# Altium PCB PCB1.PcbDoc
Units mil, origin at the board's own origin, x right, y up, seen from the top; angles counter-clockwise.
Board outline 1240 x 1035 mil, 2 copper layers (Top Layer, Bottom Layer), stack 42.17 mil thick; 34 components, 54 nets, 216 pads, 52 vias.
Unrouted connection lines stored in the file: 33.
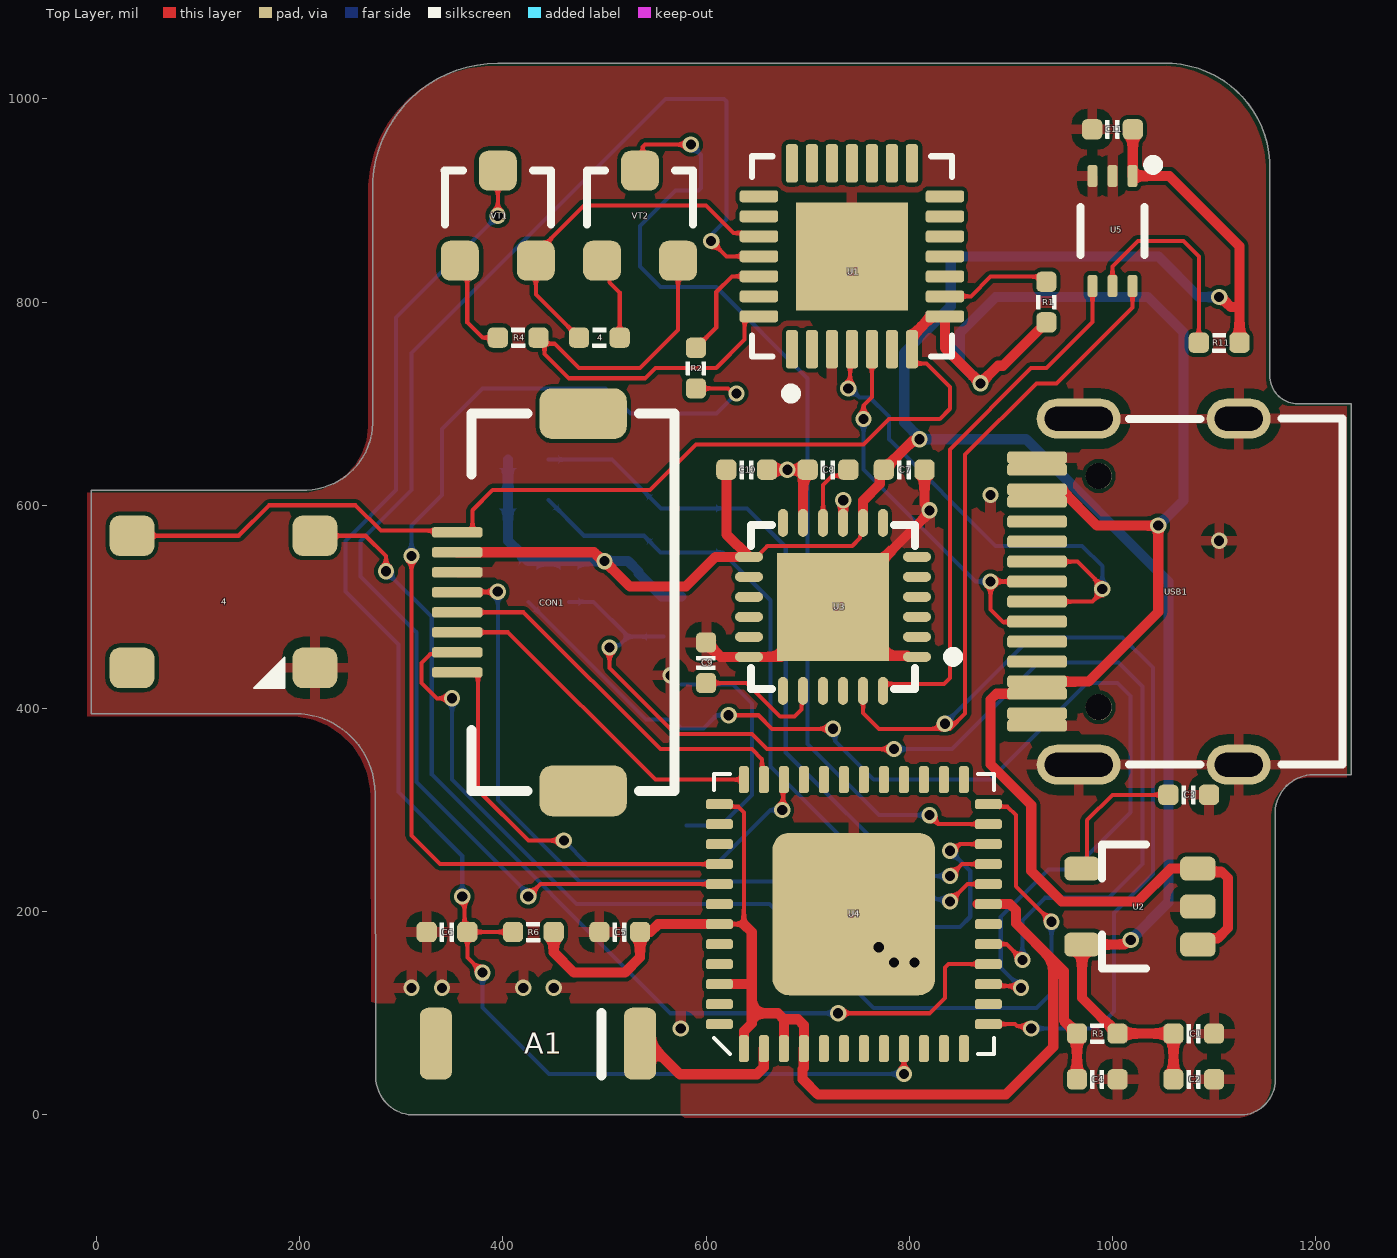
[diagram p0: Top Layer view]
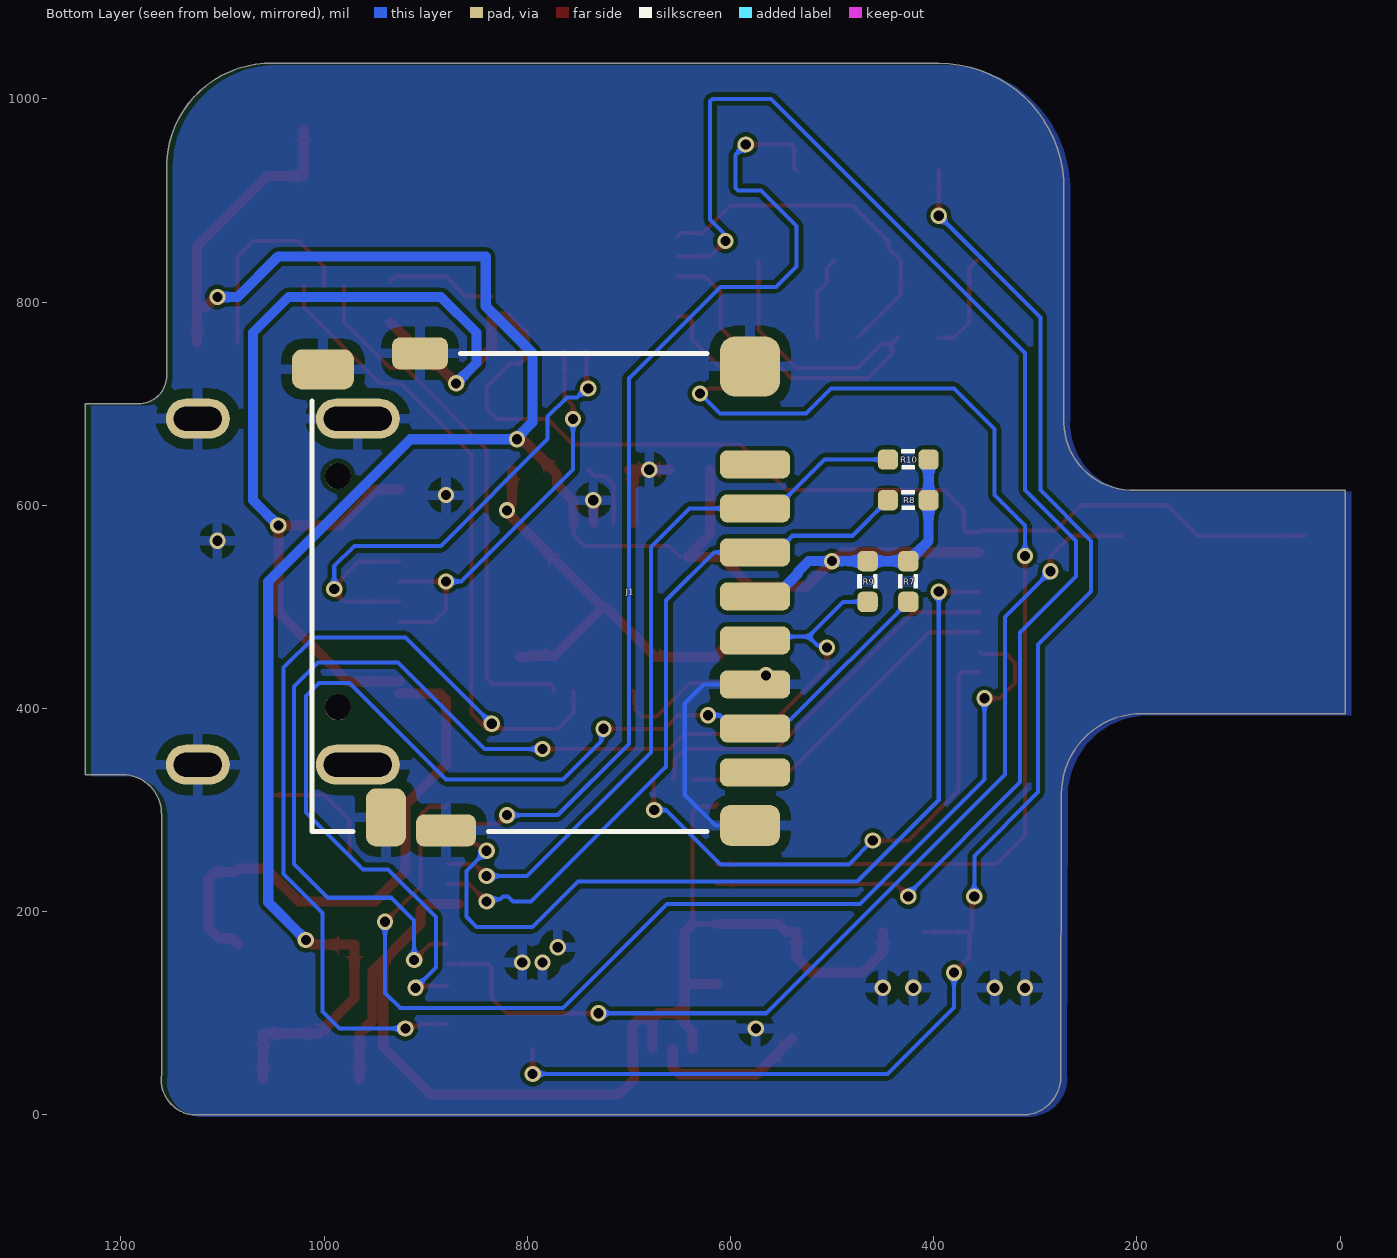
[diagram p1: Bottom Layer view, seen from below]
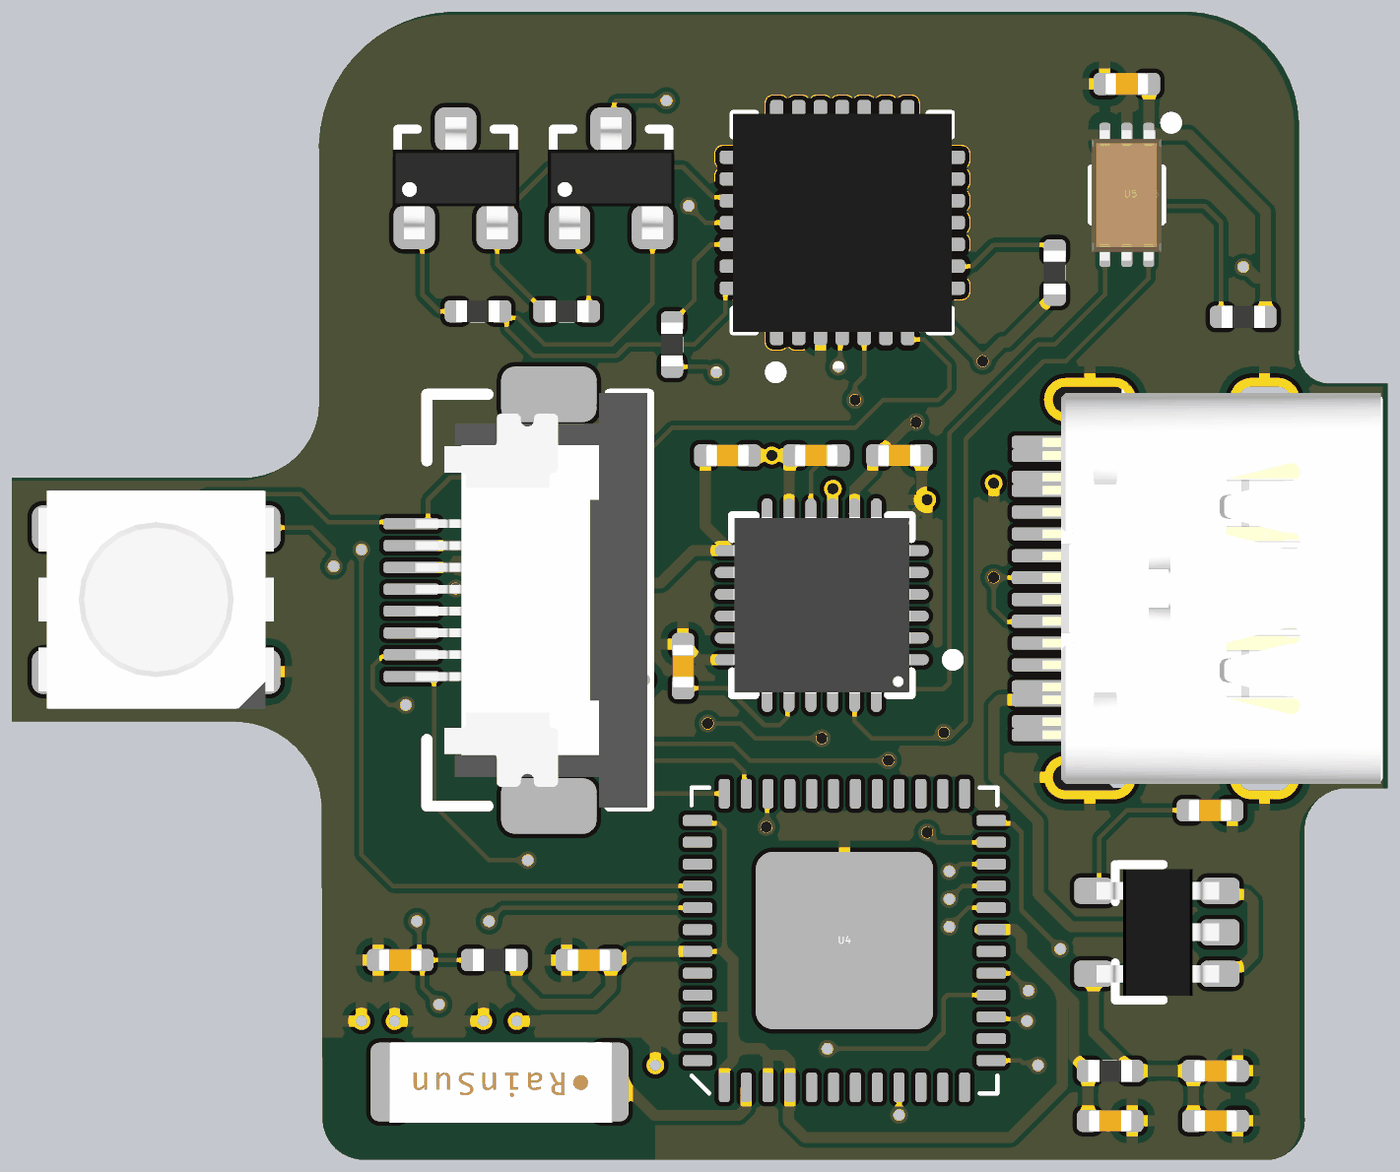
[diagram p2: 3D render of the assembled board from above, using the file's embedded part models]
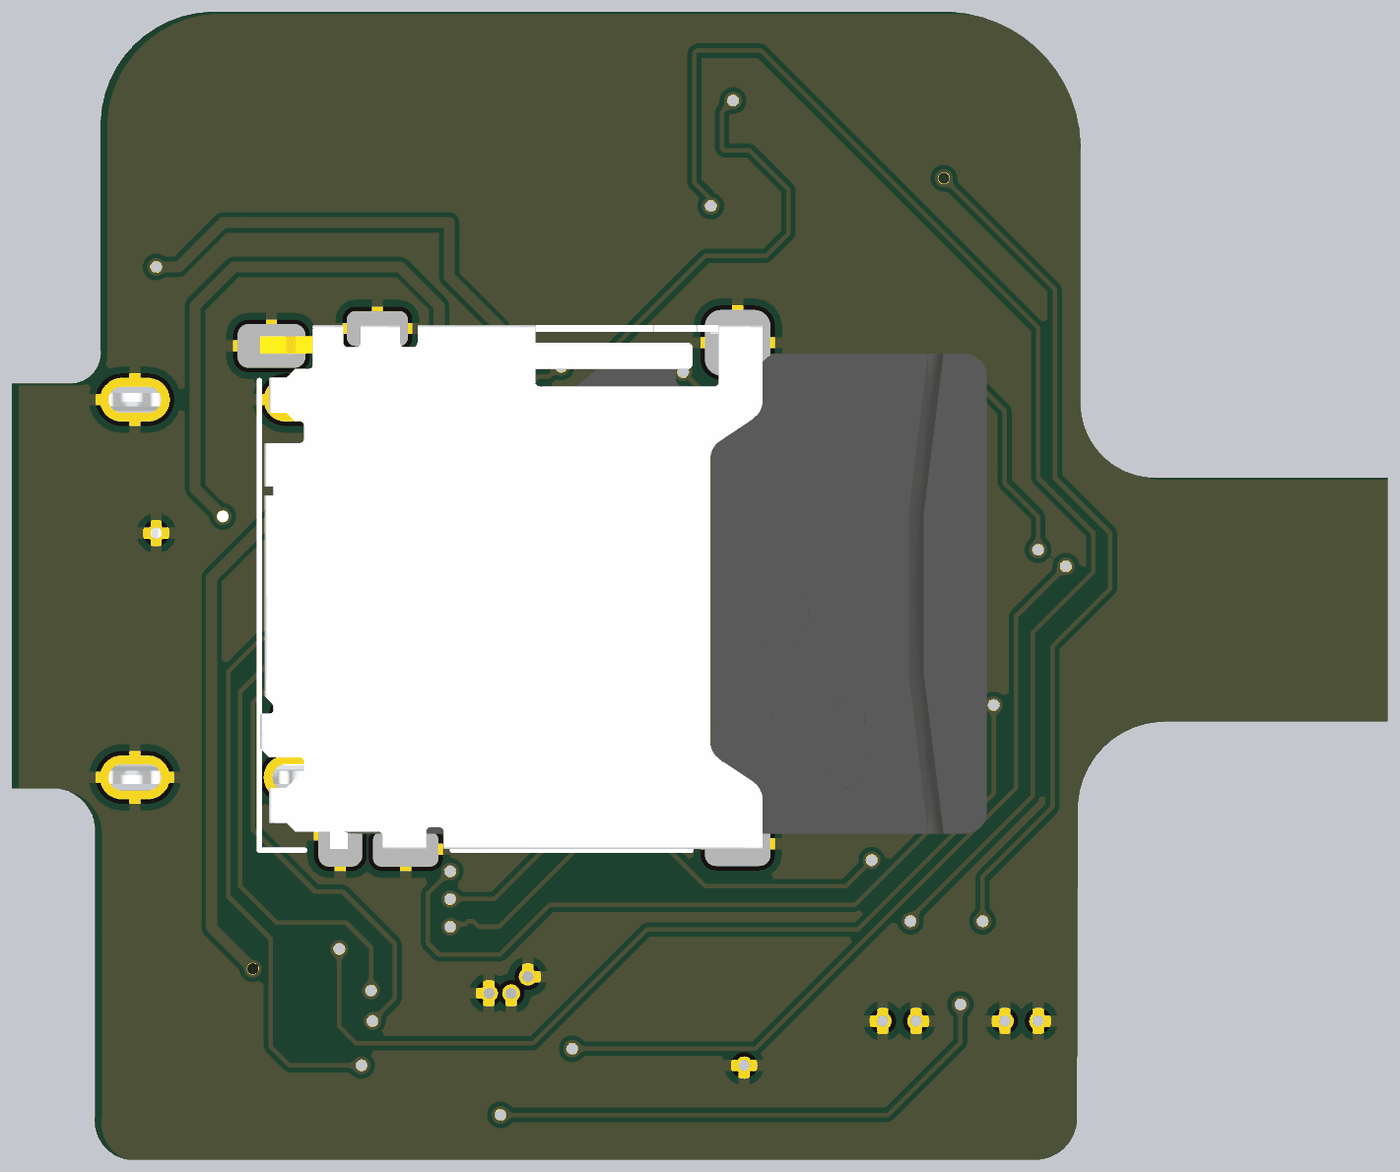
[diagram p3: 3D render of the assembled board from below, using the file's embedded part models]

## Layer stack, top to bottom
Top Solder: solder mask 0.4, Solder Resist, Dk 3.5
Top Layer: signal copper 1.4
Dielectric 1: core 39.37, PP-006, Dk 4.1
Bottom Layer: signal copper 1.4
Bottom Solder: solder mask 0.4, Solder Resist, Dk 3.5

## Board outline
310,0 cw(c312.5,37.5) 275,40 274.2,315.8 ccw(c195,315.8) 195,395 -5,395 -5,615 205,615 206.86,614.95 ccw(c204.34,682.45) 271.75,686.75 271.75,909.43 cw(c394.95,911.78) 395,1035 1050,1035 cw(c1052.5,932.5) 1155,930 1155,730 ccw(c1182.5,727.5) 1180,700 1235,700 1235,335 1197.5,335 ccw(c1198.75,296.25) 1160,295 1160,40 cw(c1125,35) 1130,0

## Design rules (kind name [scope] priority, off if disabled: settings)
Clearance [All] p1: gap=4 ignorepadtopadclearanceinfootprint=TRUE
PolygonConnect [All] p1: connectstyle=Relief reliefconductorwidth=10 reliefentries=4 polygonreliefangle="90 Angle" airgapwidth=10
RoutingVias [All] p1: holewidth=6 width=10 viastyle="Through Hole" minholewidth=6 minwidth=10 maxholewidth=20 maxwidth=20
SolderMaskExpansion [All] p1: expansion=4 istentingtop=FALSE
Width [All] p1: maxlimit=10 minlimit=4 preferedwidth=10 minimp=50.000000 maximp=50.000000 favimp=50.000000
30 further rules are at their usual default settings.

## Classes and differential pairs
net class PWR: 3V3 3V3A GND VDD-5V VDD_5V
component class Sheet1: 4 C1 C3 C5 C8 C9 C10 CON1 J1 R1 R6 R7 R8 R10 R11 U2 U4 U5

## Components (designator, comment, footprint, x,y, rotation, side; value= is the part's Value field where it differs from the comment)
4 "12K" RES_0402 495,765 r180 top value=22R (schematic designator R5)
4 "RGB" LED_5050_WS2812B 125,505 r0 top
A1 "Comment" ANT-Rainsun-AN5120 435,70 r180 top
C1 "0.1uF" CAP_0402 1080,80 r180 top value=0.1u
C2 "10uF" CAP_0402 1080,35 r0 top value=0.1u
C3 "10nF" CAP_0402 1075,315 r0 top value=0.1u
C4 "10uF" CAP_0402 985,35 r180 top value=0.1u
C5 "0.1uF" CAP_0402 515,180 r0 top value=0.1u
C6 "0.1uF" CAP_0402 345,180 r0 top value=0.1u
C7 "10nF" CAP_0402 795,635 r0 top value=0.1u
C8 "0.1uF" CAP_0402 720,635 r0 top value=0.1u
C9 "2.2nF" CAP_0402 600,445 r90 top value=0.1u
C10 "0.1uF" CAP_0402 640,635 r180 top value=0.1u
C11 "0.1uF" CAP_0402 1000,970 r0 top value=0.1u
CON1 "FFC_0.5_8" FFC_0.5_8 444,504.53 r90 top
J1 "TF-Socket" "TF-Card-Amphenol with TF" 575.87,510.31 r90 bottom
R1 "10K" RES_0402 935,800 r270 top value=22R
R2 "200R" RES_0402 590,735 r270 top value=22R
R3 "0R" RES_0402 985,80 r0 top value=22R
R4 "12K" RES_0402 415,765 r0 top value=22R
R6 "10K" RES_0402 430,180 r0 top value=22R
R7 "10K" RES_0402 425,525 r90 bottom value=22R
R8 "10K" RES_0402 425,605 r180 bottom value=22R
R9 "10K" RES_0402 465,525 r90 bottom value=22R
R10 "10K" RES_0402 425,645 r180 bottom value=22R
R11 "10K" RES_0402 1105,760 r180 top value=22R
U1 "CP2102" QFN-28 743.5,845 r90 top value=Value
U2 "LP2992 3V3" SOT23-5 1025,205 r180 top
U3 "MPU6050" QFN-24 725,500 r180 top
U4 "ESP32_SIP" QFN-48_7X7 745.47,197.62 r90 top
U5 "BH1750FVI-TR" BH1750FVI 1000,870 r270 top
USB1 "Type-C" Type-C-TOP 1025,515 r0 top
VT1 "S8050" SMT_TRIODE_NPN 395,885 r0 top
VT2 "S8050" SMT_TRIODE_NPN 535,885 r0 top

## Footprints (in the part's own frame and the unit in brackets; to place one, negate y for a bottom-side part, rotate by r counter-clockwise, add the part's x,y. Pads: shape width x height; smd on the part's side, far side on the other; paste and mask are expansions set on the pad)
ANT-Rainsun-AN5120 [mm] "选择焊盘"
  rrect50% 0.8x1.8 smd: 1:(-2.54,0) ""(2.563,0)
  silkscreen extent -1.57,-0.76 -1.57,0.79, body extent -2.57,-0.91 2.54,0.94, height 1.32
BH1750FVI [mm]
  rrect50% 0.55x0.25 smd paste+0 mask+0: 1(-1.375,0.5) 2(-1.375,0) 3(-1.375,-0.5) 4(1.375,-0.5) 5(1.375,0) 6(1.375,0.5)
  silkscreen extent -1.78,-0.8 0.6,1.14, body extent -1.49,-0.81 1.51,0.79, height 0.77
CAP_0402 [mil]
  rrect50% 20x20 smd: 1(-20,0) 2(20,0)
  silkscreen extent -7,-9 7,9, body extent -20,-10 20,10, height 20
FFC_0.5_8 [mil]
  rrect50% 50x86 smd: 0(-185.63,-35) 0(185.63,-35)
  rrect50% 10x50 smd: 1(-68.9,89) 2(-49.21,89) 3(-29.53,89) 4(-9.84,89) 5(9.84,89) 6(29.53,89) 7(49.21,89) 8(68.9,89)
  silkscreen extent -186,-125 186,75, body extent -187,-124 187,87, height 82
LED_5050_WS2812B [mil]
  rrect50% 44x40 smd: 1(-90,65) 2(-90,-65) 3(90,-65) 4(90,65)
  silkscreen extent 30,-85 60,-55, body extent -106,-98 106,98, height 69
QFN-24 [mm] "QFN, 24-Leads, Body 4.1x4.1mm (max), Pitch 0.50mm, IPC Low Density"
  oval 0.7x0.25 smd: 1(-2.1,1.25) 2(-2.1,0.75) 3(-2.1,0.25) 4(-2.1,-0.25) 5(-2.1,-0.75) 6(-2.1,-1.25) 13(2.1,-1.25) 14(2.1,-0.75) 15(2.1,-0.25) 16(2.1,0.25) 17(2.1,0.75) 18(2.1,1.25)
  oval 0.25x0.7 smd: 7(-1.25,-2.1) 8(-0.75,-2.1) 9(-0.25,-2.1) 10(0.25,-2.1) 11(0.75,-2.1) 12(1.25,-2.1) 19(1.25,2.1) 20(0.75,2.1) 21(0.25,2.1) 22(-0.25,2.1) 23(-0.75,2.1) 24(-1.25,2.1)
  rect 2.8x2.7 smd: ""(0,0)
  silkscreen extent -3.13,-2.05 2.05,2.05, body extent -2.02,-2.02 2.02,2.02, height 0.95
QFN-28 [mil]
  rrect50% 38x12 smd mask+5: 1(-91.5,59.06) 2(-91.5,39.37) 3(-91.5,19.68) 4(-91.5,0) 5(-91.5,-19.68) 6(-91.5,-39.37) 7(-91.5,-59.06) 15(91.5,-59.06) 16(91.5,-39.37) 17(91.5,-19.68) 18(91.5,0) 19(91.5,19.68) 20(91.5,39.37) 21(91.5,59.06)
  rrect50% 12x38 smd mask+5: 8(-59.06,-91.5) 9(-39.37,-91.5) 10(-19.69,-91.5) 11(0,-91.5) 12(19.69,-91.5) 13(39.37,-91.5) 14(59.06,-91.5) 22(59.06,91.5) 23(39.37,91.5) 25(0,91.5) 26(-19.69,91.5) 27(-39.37,91.5) 28(-59.06,91.5) ""(19.69,91.5)
  rect 106.3x110.24 smd: 29(0,0)
  silkscreen extent -140,-98 98,98, body extent -98,-98 98,98, height 35
QFN-48_7X7 [mm]
  rrect20% 4.064x4.064 smd: 0(0,0)
  rrect50% 0.675x0.25 smd: 1(-3.363,2.75) 2(-3.363,2.25) 3(-3.363,1.75) 4(-3.363,1.25) 5(-3.363,0.75) 6(-3.363,0.25) 7(-3.363,-0.25) 8(-3.363,-0.75) 9(-3.363,-1.25) 10(-3.363,-1.75) 11(-3.363,-2.25) 12(-3.363,-2.75) 25(3.363,-2.75) 26(3.363,-2.25) 27(3.363,-1.75) 28(3.363,-1.25) 29(3.363,-0.75) 30(3.363,-0.25) 31(3.363,0.25) 32(3.363,0.75) 33(3.363,1.25) 34(3.363,1.75) 35(3.363,2.25) 36(3.363,2.75)
  rrect50% 0.25x0.675 smd: 13(-2.75,-3.363) 14(-2.25,-3.363) 15(-1.75,-3.363) 16(-1.25,-3.363) 17(-0.75,-3.363) 18(-0.25,-3.363) 19(0.25,-3.363) 20(0.75,-3.363) 21(1.25,-3.363) 22(1.75,-3.363) 23(2.25,-3.363) 24(2.75,-3.363) 37(2.75,3.363) 38(2.25,3.363) 39(1.75,3.363) 40(1.25,3.363) 41(0.75,3.363) 42(0.25,3.363) 43(-0.25,3.363) 44(-0.75,3.363) 45(-1.25,3.363) 46(-1.75,3.363) 47(-2.25,3.363) 48(-2.75,3.363)
  silkscreen extent -3.5,-3.5 3.5,3.5, body extent -3.5,-3.5 3.5,3.5, height 1
RES_0402 [mil]
  rrect50% 20x20 smd: 1(-20,0) 2(20,0)
  silkscreen extent -7,-10 7,10, body extent -20,-10 20,10, height 14
SMT_TRIODE_NPN [mm] "Surface mount NPN transistor, package SOT-23"
  rrect50% 0.95x1 smd: 1(-0.95,-1.125) 2(0.95,-1.125) 3(0,1.125)
  silkscreen extent -1.33,-0.22 1.32,1.13, body extent -1.45,-1.4 1.45,1.4, height 1.3
SOT23-5 [mm] "SOT23, 3-Leads, Body 3.1x3.0mm (max), Pitch 0.95mm, IPC Medium Density"
  rrect50% 0.889x0.6 smd: 1(-1.5,0.95) 2(-1.5,0) 3(-1.5,-0.95) 4(1.396,-0.95) 5(1.396,0.95)
  silkscreen extent -0.2,-1.55 0.9,1.55, body extent -1.48,-1.45 1.32,1.45, height 1.2
"TF-Card-Amphenol with TF" [mm]
  rrect50% 0.7x1.75 smd: 1(3.3,0) 2(2.2,0) 3(1.1,0) 4(0,0) 5(-1.1,0) 6(-2.2,0) 7(-3.3,0) 8(-4.4,0)
  rrect50% 1x1.55 smd: 9(5.675,10.8)
  rrect50% 1.45x1 smd: 10(-5.525,9.225)
  rrect50% 1.5x1.5 smd: S1(5.75,0.125)
  rrect50% 1.016x1.5 smd: S2(-5.727,0.125)
  rrect50% 0.8x1.4 smd: S3(6.075,8.375)
  rrect50% 0.8x1.5 smd: S4(-5.85,7.725)
  silkscreen extent -5.87,1.19 6.07,11.07, body extent -5.85,-5.58 6.15,11.06, height 1.69
Type-C-TOP [mm]
  round 0.65 hole 0.65: 0(-0.98,-2.89) 0(-0.98,2.89)
  oval 1.6x1 hole 0.6 slot 1.2 at 0 deg: 1(2.52,4.325) 2(2.52,-4.325)
  oval 2.1x1 hole 0.6 slot 1.7 at 0 deg: 3(-1.48,-4.325) 4(-1.48,4.325)
  rrect50% 1.5x0.3 smd: A1(-2.52,-3.35) A4(-2.52,-2.55) A5(-2.52,-1.25) A6(-2.52,-0.25) A7(-2.52,0.25) A8(-2.52,1.25) A9(-2.52,2.55) A12(-2.52,3.35) B1(-2.52,3.05) B4(-2.52,2.25) B5(-2.52,1.75) B6(-2.52,0.75) B7(-2.52,-0.75) B8(-2.52,-1.75) B9(-2.52,-2.25) B12(-2.52,-3.05)
  silkscreen extent -0.22,-4.33 5.12,4.33, body extent -2.57,-4.48 5.18,4.48, height 3.26

## Part data
4 R4: library part 电阻-0402, "Resistor"
4: library part LED_5050_WS2812B, "LED", Type=5050
A1: library part ANT-Rainsun-AP5120
C1 C5 C6 C8 C10 C11: library part 电容-0402, "Capacitor"
C2 C4: library part 电容-0402_3, "Capacitor"
C3 C7: library part 电容-0402_1, "Capacitor"
C9: library part 电容-0402_2, "Capacitor"
CON1: "FFC", System=Connector
J1: "10 _8 + 2_ Position Card Connector Secure Digital - microSDâ„¢ Surface Mount, Right Angle Gold", Package=None, Availability=Unavailable, MF="Amphenol Commercial Products", MP=1140084168, Price=None, SnapEDA_Link=https://www.snapeda.com/parts/1140084168/Amphenol/view-part/4544529/?ref=snap
R1 R6 R7 R8 R9 R10 R11: library part 电阻-0402_1, "Resistor"
R2: library part 电阻-0402_2, "Resistor"
R3: library part 电阻-0402_3, "Resistor"
U1: "USB转TTL", MFG #1="SILICON LABS", PART DESC="SINGLE-CHIP USB TO UART BRIDGE, QFN28, RoHS.", PART NUMBER=CP2102, RefDes=RefDes, Type=DEV
U2: library part LP2992, "LDO"
U3: "六轴传感器"
U4: library part ESP32-PICO
USB1: library part USB-Type-C-TOP
VT1 VT2: library part SMT_TRIODE_NPN, "Surface mount NPN transistor, package SOT-23"

## Via types
v1: diameter 16, hole 10, Top Layer to Bottom Layer, tented both sides, 38 vias
v2: diameter 16, hole 10, Top Layer to Bottom Layer, 14 vias

## Nets (pads, with @x,y where several pads share a name; then routed paths per layer and width w, separated by ;. In a path a pad name is that pad's centre, name@x,y a point inside that pad or via, vN(x,y) a via of type N, cw(c..) or ccw(c..) an arc to the next point about the centre after c; other vN are vias at no path point)
3V3: C1.2 C2.1 C7.1 C10.2 C11.2 CON1.7 J1.4 R3.2 R7.2 R8.2 R9.2 R10.2 R11.1 U2.5 U3.8 U3.13 U5.1 | length 2625.1
  Top Layer w4: U3.13@649.68,549.29 657.4,557.01 657.4,557.17 660.23,560 743.86,560 751.57,567.72 751.57,569.28 754.53,572.24 U3.8
  Top Layer w10: CON1.7 489.64,553.74 498.38,545 v1(500,545) 525,520 580,520 609.21,549.21 U3.13 620,571.54 C10.2 ; U3.8 754.61,582.76 754.61,604.61 770.86,620.86 770.86,630.86 C7.1 803.85,663.85 808.85,663.85 v1(810,665) ; v1(1017.93,172.07) 1016.31,172.07 1011.83,167.6 U2.5 970,167.54 970,115 R3.2 C1.2 C2.1 ; C11.2 1020,930.2 1019.68,929.88 U5.1 1055.87,924.13 1125,855 1125,795 ; v1(1105,805) 1106.62,805 1116.62,795 1125,795 ; R11.1 1125,795
  Bottom Layer w10: R10.2 R8.2 405,565 R7.2 R9.2 v1(500,545) 523.23,545 533.44,534.79 533.44,533.09 556.22,510.31 J1.4 ; v1(1017.93,172.07) 1055,209.14 1055,525 915,665 v1(810,665) 810,666.62 795,681.62 795,750 840.86,795.86 840.86,845 1045,845 1085,805 v1(1105,805)
3V3A: C4.2 C5.2 R3.1 R6.2 U4.1 U4.3 U4.4 U4.19 U4.37 U4.43 U4.46 | length 1276.5
  Top Layer w4: U4.43 637.22,187.78 637.22,297.78 631.75,303.25 615.73,303.25 U4.37
  Top Layer w10: R6.2 450,160 470,140 520,140 535,155 C5.2 545,180 552.78,187.78 U4.43 ; U4.46 643.72,128.72 645,130 ; U4.1 637.28,65.31 637.28,82.28 645,90 645,100 ; 637.22,187.78 645,180 645,130 ; U4.3 676.57,94.14 ; U4.19@867.46,207.46 U4.19 899.14,207.46 905,201.6 905,188.52 941.76,151.76 ; C4.2 R3.1 952.17,92.83 952.17,141.35 941.76,151.76 ; 645,100 645,130 ; 645,100 670.72,100 676.57,94.14 ; 676.57,94.14 690.4,94.14 696.26,88.28 U4.4 696.18,65.16 696.18,46.18 695,45 695,35 710,20 895,20 941.76,66.76 941.76,151.76
BH_SCL: U3.23 U4.13 U5.6 | length 1381.9
  Top Layer w4: U3.23 754.53,395.47 770,380 v1@830,380 ; v1(835,385) v1@830,380 ; U4.13 904,89.35 906.05,87.3 917.7,87.3 v1(920,85) ; U5.6 1019.68,794.69 945,720 925,720 855,650 855,395 840,380 v1@830,380
  Bottom Layer w4: v1(835,385) 920,470 1010,470 1039.86,440.14 1039.86,237.18 1001.58,198.91 1001.58,101.83 984.75,85 v1(920,85)
BH_SDA: U3.24 U5.4 | length 526.2
  Top Layer w4: U3.24 774.21,421.48 776.91,424.18 834.18,424.18 840,430 840,655 920,735 935,735 980.32,780.31 U5.4
CP_Rx: U1.25 U4.41 | length 1428.8
  Top Layer w4: v1(425,215) 437.15,227.15 U4.41 ; v1(605,860) 620,845 U1.25
  Bottom Layer w4: v1(425,215) 425,217.5 315,327.5 315,475 260,530 260,565 310,615 310,750 560,1000 617.66,1000 620,997.66 620,881.09 606.83,867.91 606.83,861.83 v1(605,860)
Cp_TX: R2.2 U4.40 | length 1094.3
  Top Layer w4: v1(310,550) 310,275 338.17,246.83 U4.40 ; R2.2 621.75,715 626.75,710 v1(630,710)
  Bottom Layer w4: v1(310,550) 310,580 340,610 340,675 380,715 500.88,715 525.7,690.18 610.18,690.18 v1(630,710)
DC: CON1.5 U4.22 | length 880
  Top Layer w4: CON1.5 355.32,514.69 394.68,514.69 v1(395,515) ; v1(840,260) 843.25,260 849.76,266.52 U4.22
  Bottom Layer w4: v1(395,515) 395,310 475.22,229.78 750.22,229.78 795,185 850,185 860,195 860,240 v1(840,260)
DTR: R4.2 U1.28 VT2.2 | length 501
  Top Layer w4: R4.2 R4.2@441,759 ; VT2.2 572.4,772.4 535,735 475,735 451,759 R4.2@441,759 ; U1.28 641.92,785.94 638,782.02 638,763 610,735 550,735 540,725 465,725 441,749 R4.2@441,759
EN: C6.2 R6.1 U4.9 VT1.3 | length 1453.8
  Top Layer w4: v1(360,215) 362.3,212.7 362.3,182.7 C6.2 ; v1(380,140) 365,155 C6.2 ; v1(395,885) VT1.3 ; R6.1 C6.2 ; U4.9 v1(794.68,40.31) v1@795,40
  Bottom Layer w4: v1(360,215) 360,255 297.15,317.85 297.15,462.85 245,515 245,565 295,615 295,785 v1(395,885) ; v1(380,140) 380,105.63 445.32,40.31 v1(794.68,40.31)
FLASH_CLK: U4.31
FLASH_CS: U4.25
FLASH_SD0: U4.27
FLASH_SD1: U4.33
FLASH_SD2: U4.30
FLASH_SD3: U4.32
GND: 4.3 C1.1 C2.2 C3.2 C4.1 C5.1 C6.1 C7.2 C8.1 C9.2 C10.1 C11.1 CON1.6 J1.6 J1.9 J1.10 J1.S1 J1.S2 J1.S3 J1.S4 U1.3 U1.29 U2.2 U3. U3.1 U3.9 U3.11 U3.18 U4.0 U5.2 U5.3 USB1.1 USB1.2 USB1.3 USB1.4 USB1.A1 USB1.A12 USB1.B1 USB1.B12 | length 792.1
  Top Layer w10: C9.2 614.21,450.79 U3.18 673.82,450.79 723.03,500 U3. ; C10.1 C8.1 695.55,630.55 695.55,582.76 U3.11 ; U3.9 734.92,582.76 734.92,604.92 v2(735,605) ; U3.1 798.98,450.79 797.91,451.85 773.15,451.85 U3. ; C7.2 815,601.62 820,596.62 v2(820,595) 818.85,593.85 818.85,591.88 726.97,500 U3.
  Bottom Layer w4: J1.6 626.3,423.7 645,405 645,315 614.84,284.84 J1.S2
  other v2: 575,85 310,125 340,125 420,125 450,125 785,150 805,150 770,165 565,432.59 1105,565 880,610 680,635
GPIO0: U4.23 VT2.3 | length 1016.1
  Top Layer w4: VT2.3 537.66,931.95 537.66,952.66 540,955 v1(585,955) ; v1(820,295) 828.8,286.2 U4.23
  Bottom Layer w4: v1(585,955) 595,945 595,912.34 592.66,910 570,910 535,875 535,835 555,815 610,815 700,725 700,365 770,295 v1(820,295)
GPIO4: CON1.2 U4.24 | length 1084
  Top Layer w4: v1(350,410) 335,410 320,425 320,444.95 328.53,453.48 353.16,453.48 CON1.2 ; U4.24 880.49,303.25 896.75,303.25 905,295 905,225 v1(940,190)
  Bottom Layer w4: v1@350,407.99 350,330 472.45,207.55 662.45,207.55 765,105 925,105 940,120 v1(940,190)
GPIO5: CON1.1 U4.34 | length 517.4
  Top Layer w4: CON1.1 372.54,435.63 375.5,432.67 375.5,319.5 425,270 v1(460,270) ; v1(675,300) 675.79,300.79 675.79,329.21 U4.34
  Bottom Layer w4: v1(460,270) 483.43,246.57 609.84,246.57 663.27,300 v1(675,300)
GPIO9: U4.28
GPIO10: U4.29
GPIO12: U4.18
GPIO13: J1.3 R8.1 U4.20 | length 703.7
  Top Layer w4: v1(840,210) 857.15,227.15 U4.20
  Bottom Layer w4: R8.1 480,570 538.82,570 555.2,553.62 J1.3 616.38,553.62 663.48,506.52 663.48,342.66 796.14,210 813.95,210 818.95,215 823.75,215 826.46,212.3 837.7,212.3 v1(840,210)
GPIO14: J1.5 R9.1 U4.17 | length 1147.7
  Top Layer w4: v1(505,460) 505,440 570,375 645,375 660,360 v1(785,360) ; U4.17 895.67,168.09 v1(911.32,152.44)
  Bottom Layer w4: R9.1 489.07,505 523.39,470.68 ; v1(505,460) 507.3,462.3 515.01,462.3 523.39,470.68 ; J1.5@557.94,470.68 523.39,470.68 ; v1(785,360) 841.87,360 927.22,445.34 1005.98,445.34 1029.49,421.84 1029.49,246.86 996.31,213.69 933.69,213.69 911.32,191.32 v1(911.32,152.44)
GPIO15: J1.2 R10.1 U4.21 | length 726
  Top Layer w4: v1(840,235) 851.83,246.83 U4.21
  Bottom Layer w4: R10.1 507.4,645 555.47,596.93 J1.2 640.39,596.93 678.41,558.91 678.41,356.69 800.1,235 v1(840,235)
GPIO18: CON1.4 U4.35 | length 380.7
  Top Layer w4: CON1.4 420.32,494.69 555,360 645,360 655,350 655,331.89 U4.35
GPIO23: CON1.3 U4.36 | length 342.3
  Top Layer w4: CON1.3 405,475 550,330 U4.36
GPIO25: U4.14
GPIO26: J1.7 R7.1 U4.15 | length 1123.1
  Top Layer w4: v1(622.2,393.33) 651.67,393.33 665,380 v1(725,380) ; U4.15 879.71,126.86 908.14,126.86 v1(910,125)
  Bottom Layer w4: R7.1 540.85,389.15 567.11,389.15 J1.7 597.35,380.39 610.29,393.33 v1(622.2,393.33) ; v1(725,380) 727,378 727,368 765,330 880,330 975,425 1005,425 1017.83,412.17 1017.83,297.83 961.58,241.58 936.89,241.58 890,194.68 890,145 v1(910,125)
GPIO27: 4.4 U4.16 | length 994.7
  Top Layer w4: 4.4 265,570 285,550 v1(285,535) ; v1(730,100) 820,100 835,115 835,145 838.41,148.41 U4.16
  Bottom Layer w4: v1(285,535) 330,490 330,335 565,100 v1(730,100)
GPIO37: U4.6
GPIO38: U4.7
GPIO_19: U4.38
GPIO_21: U4.42
GPIO_22: U4.39
GPIO_32: U4.12
GPIO_34: U4.10
GPIO_35: U4.11
NetA1_1: A1.1: U4.2 | length 153.7
  Top Layer w10: A1.1:@538.97,75.25 574.23,40 650,40 656.81,46.81 656.81,65.16 U4.2
NetC3_1: C3.1 U2.4 | length 125.4
  Top Layer w4: 975,255 975,290 1000,315 C3.1
NetC8_2: C8.2 U3.10 | length 68.5
  Top Layer w4: U3.10 715.16,600.16 715.16,620.16 724,629 734,629 C8.2
NetC9_1: C9.1 U3.20 | length 129.5
  Top Layer w4: C9.1 640,425 672.99,392.01 687.01,392.01 694.03,399.03 694.03,403.2 694.35,403.53 694.35,416.2 U3.20
NetR1_1: R1.1 U1.9 | length 110.1
  Top Layer w4: U1.9 860.63,805.63 880,825 930,825 R1.1
NetR2_1: R2.1 U1.26 | length 111.6
  Top Layer w4: R2.1 610,775 610,810 625.32,825.31 U1.26
NetR4_1: R4.1 VT1.1 | length 100
  Top Layer w4: VT1.1 364.95,833.36 364.95,780.05 380,765 R4.1
NetR5_1: 4.1@515,765 VT2.1 | length 82.9
  Top Layer w4: VT2.1 504.95,833.36 504.95,819.48 515,809.43 4.1@515,765
NetR11_2: R11.2 U5.5 | length 205.7
  Top Layer w4: U5.5 1000,835 1025,860 1070,860 1085,845 R11.2
RTS: 4.2@475,765 U1. VT1.2 | length 351.9
  Top Layer w4: 4.2@475,765 432.4,807.6 VT1.2 444.56,852.87 444.56,859.56 480,895 600,895 627,868 648.68,868 U1.
"SENSOR VN": U4.8
"SENSOR VP": U4.5
USB-PWR-DM: U1.5 USB1.A7 USB1.B7 | length 417.1
  Top Layer w4: v1(755,685) 755,698.25 763.18,706.43 U1.5 ; USB1.B7 925.32,485 892.34,485 880,497.34 v1(880,525) 880.08,524.92 925.71,524.92 USB1.A7
  Bottom Layer w4: v1(755,685) 755,635 865,525 v1(880,525)
USB-PWR-DP: U1.4 USB1.A6 USB1.B6 | length 545.6
  Top Layer w4: v1(740,715) 741.75,716.75 741.75,751.75 U1.4 ; USB1.A6 980.16,505.16 990,515 v1(990,517.5) 990,520 965.47,544.53 USB1.B6
  Bottom Layer w4: v1(740,715) 742.17,715 750.99,706.19 761.09,706.19 780,687.27 780,665 885,560 970,560 990,540 v1(990,517.5)
VDD-5V: 
VDD_5V: 4.1@35,570 CON1.8 R1.2 U1.7 U1.8 U2.1 U2.3 USB1.A4 USB1.A9 USB1.B4 USB1.B9 | length 2610.2
  Top Layer w4: 4.1@35,570 140,570 170,600 255,600 280,575 353.42,575 CON1.8 367.14,573.43 370.1,576.39 370.1,595.1 390,615 545,615 590,660 755,660 780,685 830,685 840,695 840,716.33 816.83,739.5 806.48,739.5 802.56,743.42 U1.7
  Top Layer w10: U1.7 802.56,766.5 822,785.94 U1.8 835,755 v1(870,720) 887.3,737.3 892.3,737.3 898.66,743.66 R1.2 ; USB1.A4 885.86,414.61 880,408.75 880,345 920,305 920,240 950,210 1025,210 1057.4,242.4 U2.3 1087.38,239.08 1107.8,239.08 1113.65,233.22 1113.65,184 1103.5,173.85 1090.31,173.85 U2.1 ; USB1.B9 976.42,426.42 1045,495 v1(1045,580) 984.8,580 949.41,615.39 USB1.A9
  Bottom Layer w10: v1(870,720) 850,740 850,770 885,805 1035,805 1070,770 1070,605 v1(1045,580)
pads on no net: 4.2@35,440 A1. CON1.0 J1.1 J1.8 U1.1 U1.2 U1.6 U1.10 U1.11 U1.12 U1.13 U1.14 U1.15 U1.16 U1.17 U1.18 U1.19 U1.20 U1.21 U1.22 U1.23 U1.27 U3.2 U3.3 U3.4 U3.5 U3.6 U3.7 U3.12 U3.14 U3.15 U3.16 U3.17 U3.19 U3.21 U3.22 U4.26 U4.44 U4.45 U4.47 U4.48 USB1.0 USB1.A5 USB1.A8 USB1.B5 USB1.B8

## Polygon pours and split planes (outlines as drawn)
GND on Bottom Layer "GND_L02_P011" (solid, remove dead copper, pour order 11): 268.2,314 ccw(c189,314) 189,393.2 -11,393.2 -11,613.2 199,613.2 200.86,613.14 ccw(c198.34,680.64) 265.75,684.95 265.75,907.63 cw(c388.95,909.98) 389,1033.2 1044,1033.2 cw(c1046.5,930.7) 1149,928.2 1149,728.2 ccw(c1176.5,725.7) 1174,698.2 1229,698.2 1229,333.2 1191.5,333.2 ccw(c1192.75,294.45) 1154,293.2 1154,38.2 cw(c1119,33.2) 1124,-1.8 304,-1.8 cw(c306.5,35.7) 269,38.2
GND on Top Layer "GND_L01_P015" (solid, remove dead copper, pour order 15): 269.98,313.05 ccw(c190.78,313.05) 190.78,392.25 -9.22,392.25 -9.22,612.25 200.78,612.25 202.64,612.2 ccw(c200.13,679.69) 267.54,684 267.54,906.68 cw(c390.73,909.03) 390.78,1032.25 1045.78,1032.25 cw(c1048.28,929.75) 1150.78,927.25 1150.78,727.25 ccw(c1178.28,724.75) 1175.78,697.25 1230.78,697.25 1230.78,332.25 1193.28,332.25 ccw(c1194.53,293.5) 1155.78,292.25 1155.78,37.25 cw(c1120.78,32.25) 1125.78,-2.75 305.78,-2.75 cw(c308.28,34.75) 270.78,37.25

## Other copper
Top Layer:
  pour cut-out: 550,105 575,80 575,0 535,0
  pour cut-out: 275,110 562.41,110 570,102.41 560,92.41 560,0 270,0
  pour cut-out: 570,-75 575,-80 575,-75

## Silkscreen, mask and mechanical layers (free items; w line width, h text height)
Mechanical 1:
  lines w47.24: -695,-2225 -695,1775 5305,1775 5305,-2225 -695,-2225